# Allegro board filterboard.brd
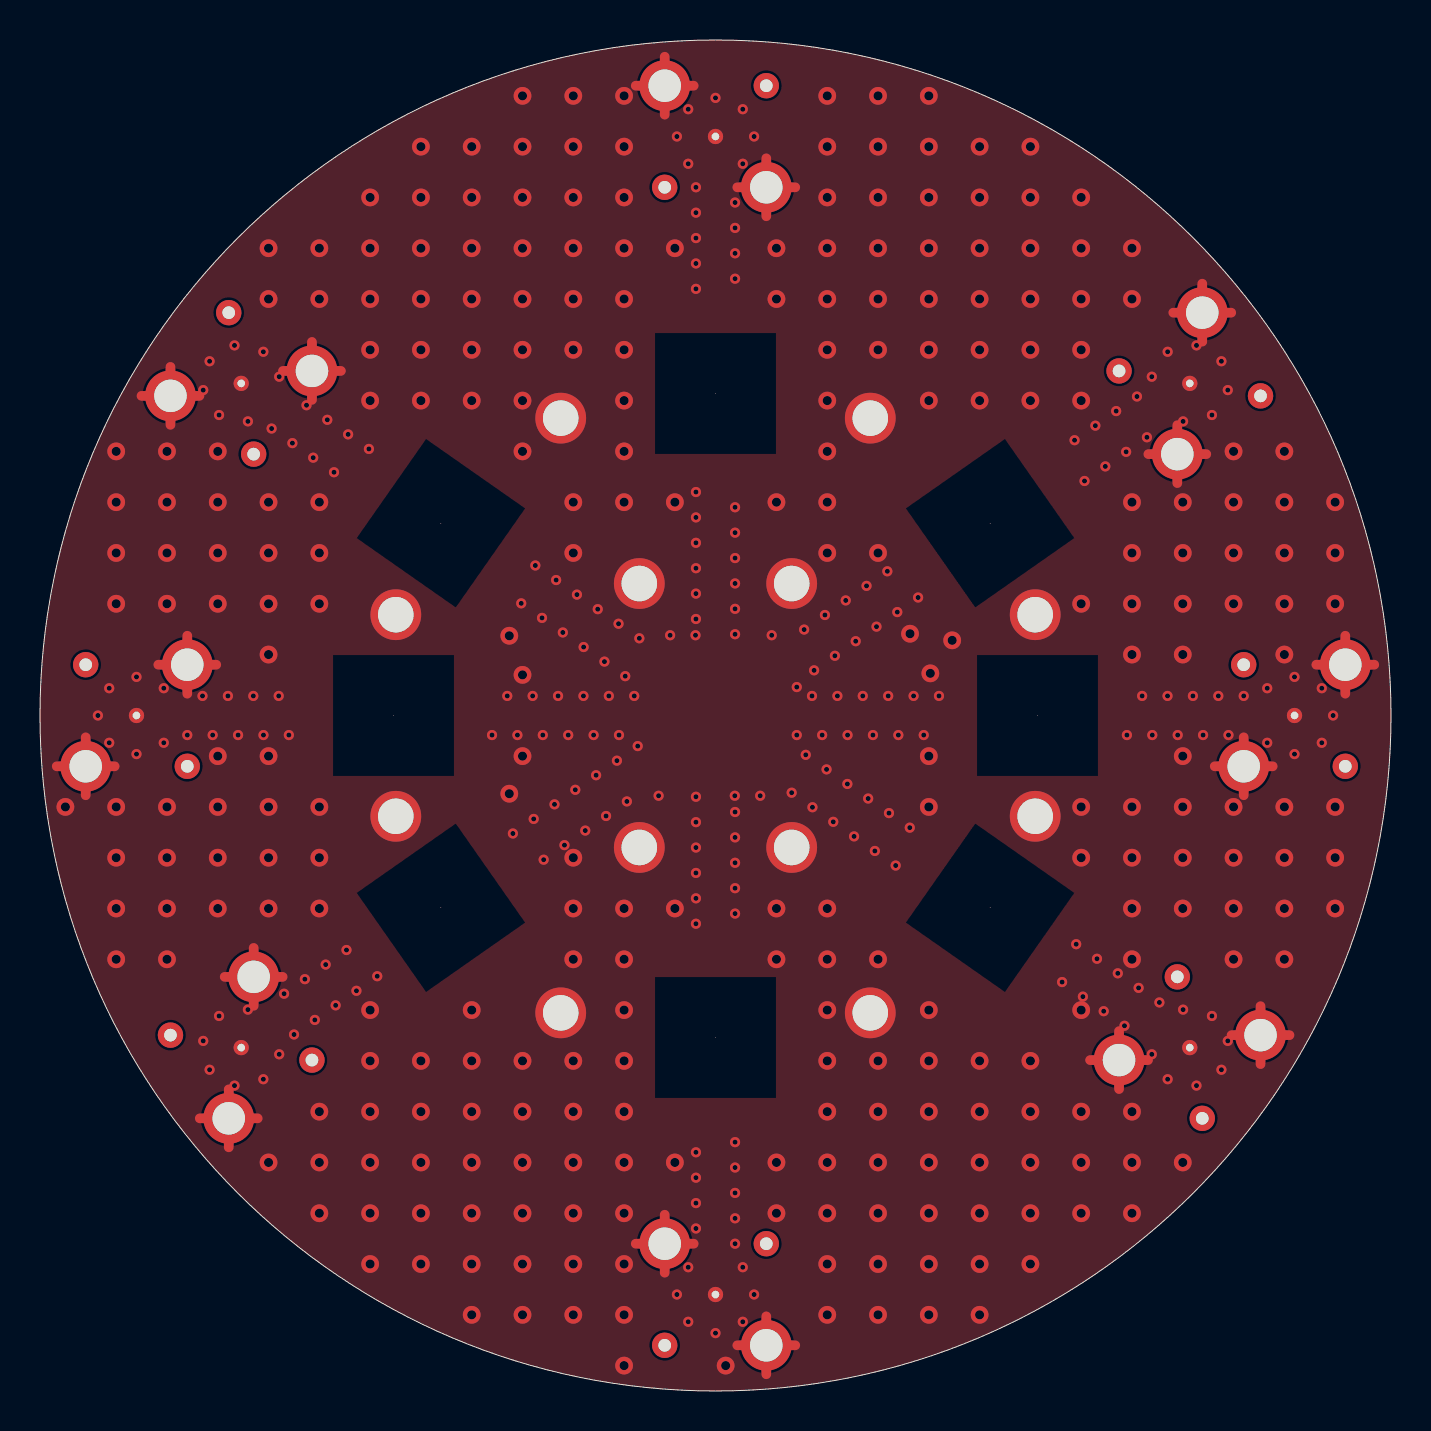
[diagram p0: board, top side]
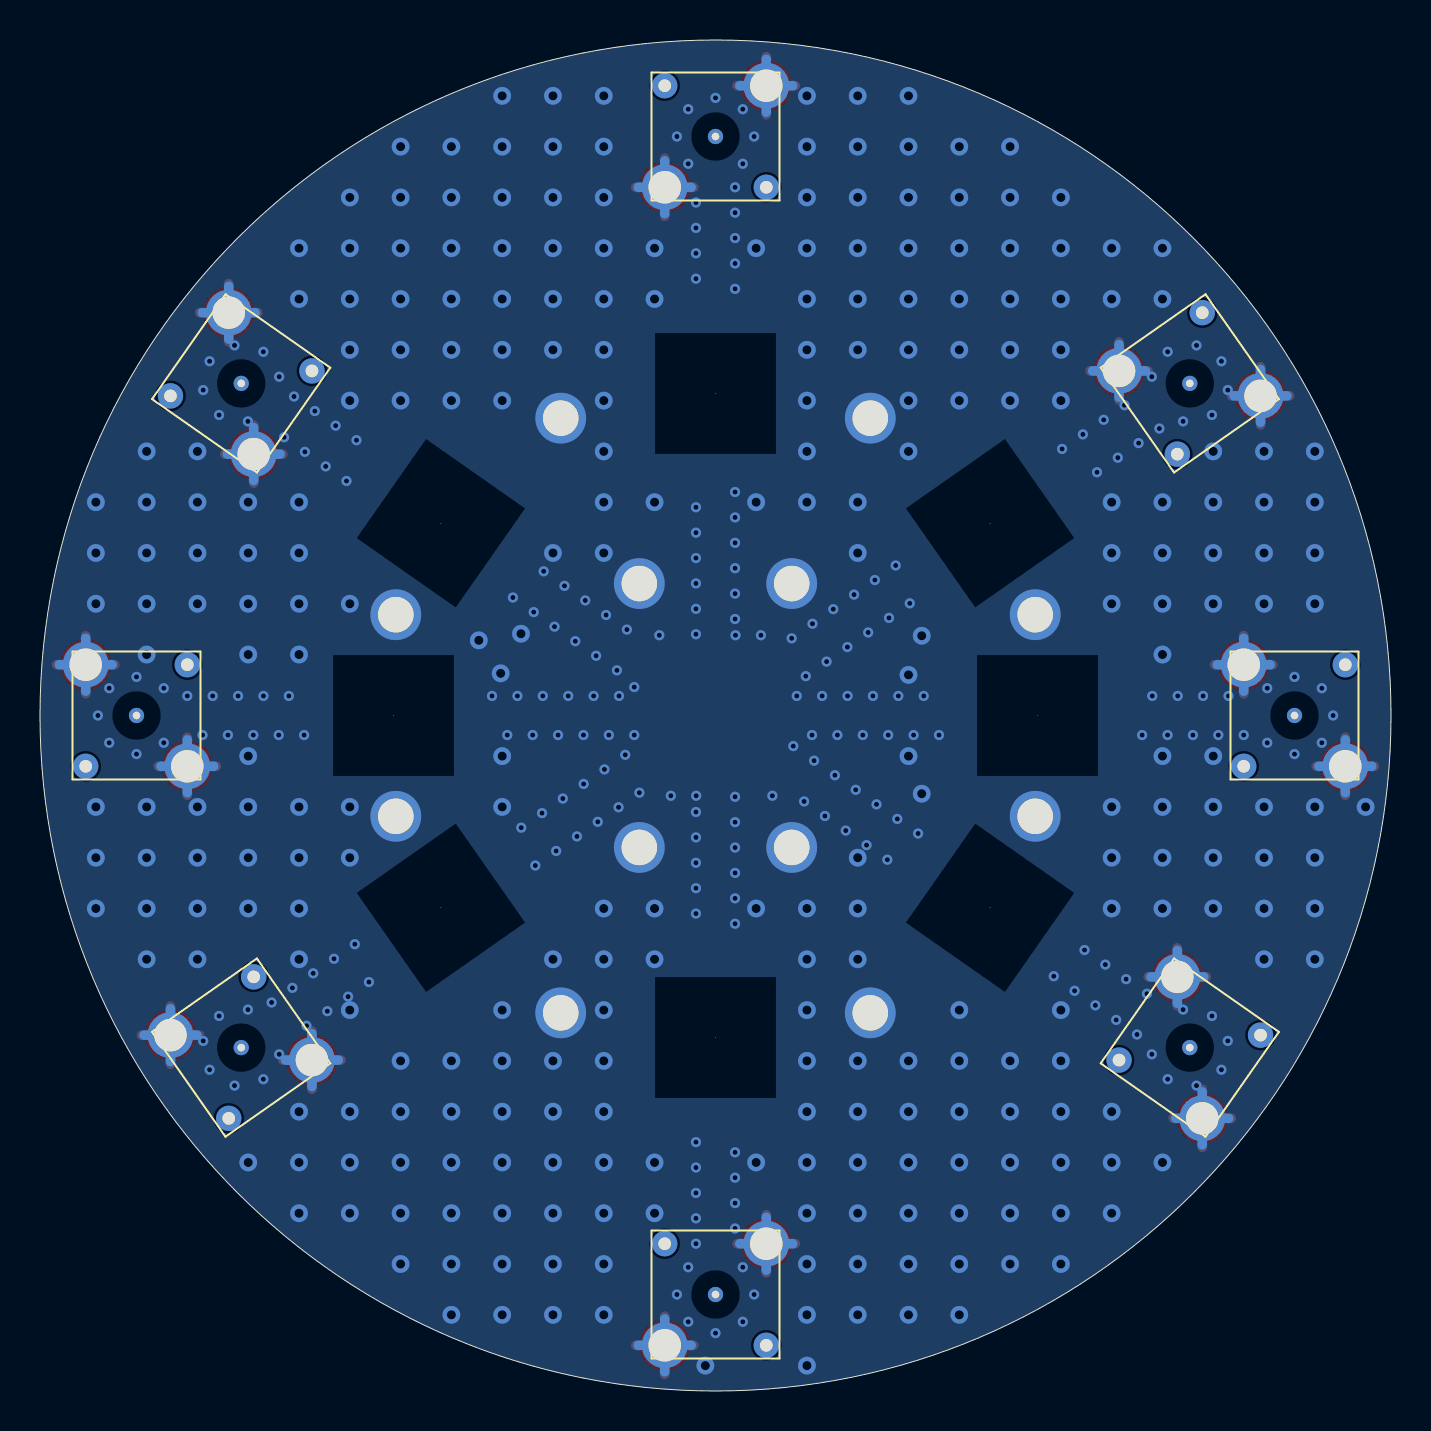
[diagram p1: board, bottom side, seen from below]

Outline 67.56 x 67.56 mm; copper layers: TOP, 02_GND, 03_SIG, BOTTOM. Coordinates in mm from the lower left corner of the outline.
Outline path: circle c33.78,33.78 r33.78

## Placement (name value [footprint] x y rotation side)
J1  -  [SSMA_BB]  62.74 33.78 180 bottom
J2  -  [SSMA_BB]  57.5 17.17 145 bottom
J3  -  [SSMA_BB]  33.78 4.83 90 bottom
J4  -  [SSMA_BB]  10.06 17.17 35 bottom
J5  -  [SSMA_BB]  4.83 33.78 0 bottom
J6  -  [SSMA_BB]  10.06 50.39 325 bottom
J7  -  [SSMA_BB]  33.78 62.74 270 bottom
J8  -  [SSMA_BB]  57.5 50.39 215 bottom
MTG1  -  [HOLE070P]  37.59 40.38 0 top
MTG2  -  [HOLE070P]  41.52 48.65 0 top
MTG3  -  [HOLE070P]  26.04 48.65 0 top
MTG4  -  [HOLE070P]  37.59 27.18 240 top
MTG5  -  [HOLE070P]  29.97 27.18 180 top
MTG6  -  [HOLE070P]  26.04 18.91 0 top
MTG7  -  [HOLE070P]  41.52 18.91 0 top
MTG8  -  [HOLE070P]  29.97 40.38 60 top
MTG9  -  [HOLE070P]  49.77 38.82 0 top
MTG10  -  [HOLE070P]  49.77 28.74 0 top
MTG11  -  [HOLE070P]  17.79 38.82 0 top
MTG12  -  [HOLE070P]  17.79 28.74 0 top
NOREF  -  []  33.78 30.28 90 top
NOREF#2  -  []  33.78 0 90 top
NOREF#3  -  []  33.78 30.78 90 top
R1  -  [FILTER]  49.88 33.78 0 top
R2  -  [FILTER]  47.51 24.17 325 top
R3  -  [FILTER]  33.78 17.68 0 top
R4  -  [FILTER]  20.05 24.17 215 top
R5  -  [FILTER]  17.68 33.78 0 top
R6  -  [FILTER]  20.05 43.4 145 top
R7  -  [FILTER]  33.78 49.88 0 top
R8  -  [FILTER]  47.51 43.4 35 top

## Library data of the parts
J1-J8 = SSMA_BB
MTG1-MTG12 = HOLE070P
R1-R8 = FILTER

## Footprints (pads in the part's own frame, mm; a bottom-side part is the same pattern mirrored in y, then rotated)
FILTER
  round 0.025 hole 5.994 unplated: (0,0)
HOLE070P
  round 2.54 hole 1.778: 1(0,0)
SSMA_BB
  round 1.27 hole 0.635: (-2.54,-2.54) (2.54,2.54)
  round 0.762 hole 0.381: 1(0,0)
  round 2.54 hole 1.626: 2(-2.54,2.54) 3(2.54,-2.54)

## Nets
GND: J1.2(TP-2) J1.3(TP-3) J2.2(TP-2) J2.3(TP-3) J3.2(TP-2) J3.3(TP-3) J4.2(TP-2) J4.3(TP-3) J5.2(TP-2) J5.3(TP-3) J6.2(TP-2) J6.3(TP-3) J7.2(TP-2) J7.3(TP-3) J8.2(TP-2) J8.3(TP-3) MTG1.1(TP-1) MTG2.1(TP-1) MTG3.1(TP-1) MTG4.1(TP-1) MTG5.1(TP-1) MTG6.1(TP-1) MTG7.1(TP-1) MTG8.1(TP-1) MTG9.1(TP-1) MTG10.1(TP-1) MTG11.1(TP-1) MTG12.1(TP-1)
MICROWAVE: J1.1(TP-1) J2.1(TP-1) J3.1(TP-1) J4.1(TP-1) J5.1(TP-1) J6.1(TP-1) J7.1(TP-1) J8.1(TP-1)

## Via types
v1: diameter 0.508, hole 0.254, TOP to BOTTOM, 228 vias
v2: diameter 0.889, hole 0.457, TOP to BOTTOM, 280 vias

## Routing (per net, layer and track width the routed paths; a pad name or vN(x,y) marks a point on that pad's centre or on a via; arc(x,y) is an arc through that point)
GND: length 261.8
  TOP w0.483: 12.15,51.01 J6.3 ; J6.3 13.6,49.57 ; J6.3 15.05,51.01 ; J6.3 13.6,52.46 ; J2.3 53.96,18 ; J2.3 53.96,15.1 ; J2.3 55.41,16.55 ; J2.3 52.52,16.55 ; J7.2 31.24,66.73 ; J7.2 29.79,65.28 ; J7.2 32.69,65.28 ; J7.2 31.24,63.83 ; J3.3 31.24,8.81 ; J3.3 32.69,7.37 ; J3.3 31.24,5.92 ; J3.3 29.79,7.37 ; J8.3 56.88,48.3 ; J8.3 55.43,46.85 ; J8.3 58.33,46.85 ; J8.3 56.88,45.4 ; 60.2,29.79 J1.3 ; J1.3 60.2,32.69 ; J1.3 58.75,31.24 ; J1.3 61.65,31.24 ; 34.87,2.29 J3.2 ; J3.2 36.32,3.73 ; J3.2 36.32,0.84 ; J3.2 37.77,2.29 ; 0.84,31.24 J5.2 ; J5.2 3.73,31.24 ; J5.2 2.29,29.79 ; J5.2 2.29,32.69 ; 34.87,60.2 J7.3 ; J7.3 37.77,60.2 ; J7.3 36.32,58.75 ; J7.3 36.32,61.65 ; 7.37,34.87 J5.3 ; J5.3 8.81,36.32 ; J5.3 7.37,37.77 ; J5.3 5.92,36.32 ; 9.44,12.19 J4.2 ; J4.2 7.99,13.64 ; J4.2 10.89,13.64 ; J4.2 9.44,15.08 ; 63.83,36.32 J1.2 ; J1.2 65.28,37.77 ; J1.2 65.28,34.87 ; J1.2 66.73,36.32 ; 61.04,16.35 J2.2 ; J2.2 61.04,19.25 ; J2.2 59.59,17.8 ; J2.2 62.49,17.8 ; J6.2 6.53,51.22 ; J6.2 5.08,49.77 ; J6.2 7.97,49.77 ; J6.2 6.53,48.32 ; 9.24,20.71 J4.3 ; J4.3 12.13,20.71 ; J4.3 10.69,22.16 ; J4.3 10.69,19.26 ; 58.13,52.48 J8.2 ; J8.2 58.13,55.38 ; J8.2 56.68,53.93 ; J8.2 59.57,53.93
  03_SIG w0.483: 0.96,31.24 J5.2 ; J5.2 3.61,31.24 ; J5.2 2.29,32.56 ; J5.2 2.29,29.92 ; 56.88,45.53 J8.3 ; J8.3 58.2,46.85 ; J8.3 56.88,48.17 ; J8.3 55.56,46.85 ; J5.3 8.69,36.32 ; J5.3 6.04,36.32 ; J5.3 7.37,37.64 ; J5.3 7.37,35 ; J1.3 60.2,32.56 ; J1.3 58.88,31.24 ; J1.3 61.52,31.24 ; J1.3 60.2,29.92 ; 29.92,65.28 J7.2 ; J7.2 32.56,65.28 ; J7.2 31.24,66.6 ; J7.2 31.24,63.96 ; 35,2.29 J3.2 ; J3.2 36.32,0.96 ; J3.2 36.32,3.61 ; J3.2 37.64,2.29 ; J6.3 14.92,51.01 ; J6.3 12.28,51.01 ; J6.3 13.6,52.34 ; J6.3 13.6,49.69 ; 9.44,12.31 J4.2 ; J4.2 9.44,14.96 ; J4.2 10.76,13.64 ; J4.2 8.12,13.64 ; J2.3 55.29,16.55 ; J2.3 53.96,17.87 ; J2.3 52.64,16.55 ; J2.3 53.96,15.23 ; 56.8,53.93 J8.2 ; J8.2 58.13,52.61 ; J8.2 59.45,53.93 ; J8.2 58.13,55.25 ; 31.24,6.04 J3.3 ; J3.3 32.56,7.37 ; J3.3 29.92,7.37 ; J3.3 31.24,8.69 ; J4.3 12.01,20.71 ; J4.3 9.37,20.71 ; J4.3 10.69,19.39 ; J4.3 10.69,22.03 ; 61.04,16.48 J2.2 ; J2.2 62.36,17.8 ; J2.2 61.04,19.12 ; J2.2 59.72,17.8 ; 63.96,36.32 J1.2 ; J1.2 65.28,35 ; J1.2 66.6,36.32 ; J1.2 65.28,37.64 ; 35,60.2 J7.3 ; J7.3 36.32,58.88 ; J7.3 37.64,60.2 ; J7.3 36.32,61.52 ; 5.2,49.77 J6.2 ; J6.2 7.85,49.77 ; J6.2 6.53,48.45 ; J6.2 6.53,51.09
  BOTTOM w0.483: J8.3 58.2,46.85 ; J8.3 55.56,46.85 ; J8.3 56.88,45.53 ; J8.3 56.88,48.17 ; 31.24,6.04 J3.3 ; J3.3 32.56,7.37 ; J3.3 29.92,7.37 ; J3.3 31.24,8.69 ; 36.32,58.88 J7.3 ; J7.3 36.32,61.52 ; J7.3 35,60.2 ; J7.3 37.64,60.2 ; J6.2 7.85,49.77 ; J6.2 6.53,51.09 ; J6.2 6.53,48.45 ; J6.2 5.2,49.77 ; J2.3 53.96,17.87 ; J2.3 52.64,16.55 ; J2.3 55.29,16.55 ; J2.3 53.96,15.23 ; J4.3 10.69,22.03 ; J4.3 12.01,20.71 ; J4.3 9.37,20.71 ; J4.3 10.69,19.39 ; J8.2 58.13,55.25 ; J8.2 59.45,53.93 ; J8.2 56.8,53.93 ; J8.2 58.13,52.61 ; J1.2 65.28,37.64 ; J1.2 63.96,36.32 ; J1.2 66.6,36.32 ; J1.2 65.28,35 ; 29.92,65.28 J7.2 ; J7.2 32.56,65.28 ; J7.2 31.24,66.6 ; J7.2 31.24,63.96 ; 59.72,17.8 J2.2 ; J2.2 61.04,16.48 ; J2.2 61.04,19.12 ; J2.2 62.36,17.8 ; J3.2 37.64,2.29 ; J3.2 35,2.29 ; J3.2 36.32,3.61 ; J3.2 36.32,0.96 ; 2.29,29.92 J5.2 ; J5.2 3.61,31.24 ; J5.2 2.29,32.56 ; J5.2 0.96,31.24 ; J5.3 8.69,36.32 ; J5.3 7.37,35 ; J5.3 6.04,36.32 ; J5.3 7.37,37.64 ; 8.12,13.64 J4.2 ; J4.2 9.44,12.31 ; J4.2 10.76,13.64 ; J4.2 9.44,14.96 ; J6.3 14.92,51.01 ; J6.3 12.28,51.01 ; J6.3 13.6,49.69 ; J6.3 13.6,52.34 ; J1.3 60.2,32.56 ; J1.3 58.88,31.24 ; J1.3 61.52,31.24 ; J1.3 60.2,29.92
  vias: v1(2.9,33.78) v1(3.46,35.15) v1(3.46,32.42) v1(4.83,35.71) v1(4.83,31.85) v1(6.19,35.15) v1(6.19,32.42) v1(7.37,32.8) v1(8.13,34.76) v1(8.16,50.06) v1(8.16,17.51) v1(8.48,51.5) v1(8.48,16.07) v1(8.64,32.8) v1(8.96,48.81) v1(8.96,18.75) v1(9.4,34.76) v1(9.73,52.29) v1(9.73,15.27) v1(9.91,32.8) v1(10.4,48.49) v1(10.4,19.07) v1(10.67,34.76) v1(11.17,51.97) v1(11.18,32.8) v1(11.17,15.59) v1(11.58,48.13) v1(11.96,50.73) v1(11.94,34.76) v1(11.96,16.84) v1(12.21,19.87) v1(12.45,32.8) v1(12.62,47.4) v1(12.7,17.83) v1(13.33,49.3) v1(13.25,20.6) v1(13.66,46.68) v1(13.74,18.56) v1(14.29,21.33) v1(14.37,48.57) v1(14.7,45.95) v1(14.79,19.29) v1(15.33,22.05) v1(15.41,47.84) v1(15.83,20.01) v1(16.45,47.11) v1(16.87,20.74) v1(22.61,32.8) v1(23.37,34.76) v1(23.65,27.88) v1(23.88,32.8) v1(24.07,39.39) v1(24.64,34.76) v1(24.69,28.61) v1(24.77,41.28) v1(25.11,38.66) v1(25.15,32.8) v1(25.19,26.57) v1(25.73,29.34) v1(25.81,40.56) v1(25.91,34.76) v1(26.15,37.93) v1(26.23,27.3) v1(26.42,32.8) v1(26.77,30.07) v1(26.85,39.83) v1(27.19,37.21) v1(27.18,34.76) v1(27.27,28.03) v1(27.69,32.8) v1(27.81,30.79) v1(27.89,39.1) v1(28.23,36.48) v1(28.31,28.76) v1(28.45,34.76) v1(28.85,31.52) v1(28.93,38.37) v1(28.96,32.8) v1(29.27,35.75) v1(29.35,29.48) v1(29.72,34.76) v1(29.89,32.25) v1(29.97,37.64) v1(30.94,29.77) v1(31.51,37.8) v1(31.85,62.74) v1(31.85,4.83) v1(32.42,64.1) v1(32.42,61.37) v1(32.42,6.19) v1(32.42,3.46) v1(32.8,60.2) v1(32.8,58.93) v1(32.8,57.66) v1(32.8,56.39) v1(32.8,55.12) v1(32.8,44.96) v1(32.8,43.69) v1(32.8,42.42) v1(32.8,41.15) v1(32.8,39.88) v1(32.8,38.61) v1(32.78,37.8) v1(32.8,29.72) v1(32.8,28.45) v1(32.8,27.18) v1(32.8,25.91) v1(32.8,24.64) v1(32.8,23.37) v1(32.8,11.94) v1(32.8,10.67) v1(32.8,9.4) v1(32.8,8.13) v1(33.78,64.67) v1(33.78,2.9) v1(34.76,59.44) v1(34.76,58.17) v1(34.76,56.9) v1(34.76,55.63) v1(34.76,44.2) v1(34.76,42.93) v1(34.76,41.66) v1(34.76,40.39) v1(34.76,39.12) v1(34.76,37.85) v1(34.75,29.77) v1(34.76,28.96) v1(34.76,27.69) v1(34.76,26.42) v1(34.76,25.15) v1(34.76,23.88) v1(34.76,12.45) v1(34.76,11.18) v1(34.76,9.91) v1(34.76,8.64) v1(34.76,7.37) v1(35.15,64.1) v1(35.15,61.37) v1(35.15,6.19) v1(35.15,3.46) v1(35.71,62.74) v1(35.71,4.83) v1(36.02,29.77) v1(36.59,37.8) v1(37.59,29.92) v1(37.85,35.2) v1(37.85,32.8) v1(38.21,38.08) v1(38.3,31.82) v1(38.61,34.76) v1(38.63,29.19) v1(38.71,36.04) v1(39.12,32.8) v1(39.25,38.81) v1(39.34,31.09) v1(39.67,28.46) v1(39.75,36.77) v1(39.88,34.76) v1(40.3,39.54) v1(40.39,32.8) v1(40.38,30.36) v1(40.71,27.74) v1(40.79,37.5) v1(41.15,34.76) v1(41.34,40.26) v1(41.42,29.63) v1(41.66,32.8) v1(41.75,27.01) v1(41.83,38.23) v1(42.38,40.99) v1(42.42,34.76) v1(42.46,28.9) v1(42.79,26.28) v1(42.87,38.95) v1(42.93,32.8) v1(43.5,28.17) v1(43.69,34.76) v1(43.91,39.68) v1(44.2,32.8) v1(44.96,34.76) v1(51.11,20.45) v1(51.74,47.55) v1(51.82,22.35) v1(52.16,19.72) v1(52.24,45.51) v1(52.78,48.28) v1(52.86,21.62) v1(53.2,18.99) v1(53.28,46.24) v1(53.82,49.01) v1(53.9,20.89) v1(54.32,46.97) v1(54.24,18.27) v1(54.36,32.8) v1(54.86,49.73) v1(54.94,20.16) v1(55.12,34.76) v1(55.36,47.7) v1(55.6,50.73) v1(55.63,32.8) v1(55.6,16.84) v1(55.98,19.43) v1(56.39,51.97) v1(56.39,34.76) v1(56.39,15.59) v1(56.9,32.8) v1(57.17,48.49) v1(57.17,19.07) v1(57.66,34.76) v1(57.84,52.29) v1(57.84,15.27) v1(58.17,32.8) v1(58.61,48.81) v1(58.61,18.75) v1(58.93,34.76) v1(59.08,51.5) v1(59.08,16.07) v1(59.4,50.06) v1(59.4,17.51) v1(59.44,32.8) v1(60.2,34.76) v1(61.37,35.15) v1(61.37,32.42) v1(62.74,35.71) v1(62.74,31.85) v1(64.1,35.15) v1(64.1,32.42) v1(64.67,33.78) v2(1.27,29.21) v2(3.81,46.99) v2(3.81,44.45) v2(3.81,41.91) v2(3.81,39.37) v2(3.81,29.21) v2(3.81,26.67) v2(3.81,24.13) v2(3.81,21.59) v2(6.35,46.99) v2(6.35,44.45) v2(6.35,41.91) v2(6.35,39.37) v2(6.35,29.21) v2(6.35,26.67) v2(6.35,24.13) v2(6.35,21.59) v2(8.89,46.99) v2(8.89,44.45) v2(8.89,41.91) v2(8.89,39.37) v2(8.89,31.75) v2(8.89,29.21) v2(8.89,26.67) v2(8.89,24.13) v2(11.43,57.15) v2(11.43,54.61) v2(11.43,44.45) v2(11.43,41.91) v2(11.43,39.37) v2(11.43,36.83) v2(11.43,31.75) v2(11.43,29.21) v2(11.43,26.67) v2(11.43,24.13) v2(11.43,11.43) v2(13.97,57.15) v2(13.97,54.61) v2(13.97,44.45) v2(13.97,41.91) v2(13.97,39.37) v2(13.97,29.21) v2(13.97,26.67) v2(13.97,24.13) v2(13.97,13.97) v2(13.97,11.43) v2(13.97,8.89) v2(16.51,59.69) v2(16.51,57.15) v2(16.51,54.61) v2(16.51,52.07) v2(16.51,49.53) v2(16.51,19.05) v2(16.51,16.51) v2(16.51,13.97) v2(16.51,11.43) v2(16.51,8.89) v2(16.51,6.35) v2(19.05,62.23) v2(19.05,59.69) v2(19.05,57.15) v2(19.05,54.61) v2(19.05,52.07) v2(19.05,49.53) v2(19.05,16.51) v2(19.05,13.97) v2(19.05,11.43) v2(19.05,8.89) v2(19.05,6.35) v2(21.59,62.23) v2(21.59,59.69) v2(21.59,57.15) v2(21.59,54.61) v2(21.59,52.07) v2(21.59,49.53) v2(21.59,19.05) v2(21.59,16.51) v2(21.59,13.97) v2(21.59,11.43) v2(21.59,8.89) v2(21.59,6.35) v2(21.59,3.81) v2(23.47,37.77) v2(23.47,29.87) v2(24.13,64.77) v2(24.13,62.23) v2(24.13,59.69) v2(24.13,57.15) v2(24.13,54.61) v2(24.13,52.07) v2(24.13,49.53) v2(24.13,46.99) v2(24.13,35.81) v2(24.13,31.75) v2(24.13,16.51) v2(24.13,13.97) v2(24.13,11.43) v2(24.13,8.89) v2(24.13,6.35) v2(24.13,3.81) v2(26.67,64.77) v2(26.67,62.23) v2(26.67,59.69) v2(26.67,57.15) v2(26.67,54.61) v2(26.67,52.07) v2(26.67,44.45) v2(26.67,41.91) v2(26.67,26.67) v2(26.67,24.13) v2(26.67,21.59) v2(26.67,16.51) v2(26.67,13.97) v2(26.67,11.43) v2(26.67,8.89) v2(26.67,6.35) v2(26.67,3.81) v2(29.21,64.77) v2(29.21,62.23) v2(29.21,59.69) v2(29.21,57.15) v2(29.21,54.61) v2(29.21,52.07) v2(29.21,49.53) v2(29.21,46.99) v2(29.21,44.45) v2(29.21,24.13) v2(29.21,21.59) v2(29.21,19.05) v2(29.21,16.51) v2(29.21,13.97) v2(29.21,11.43) v2(29.21,8.89) v2(29.21,6.35) v2(29.21,3.81) v2(29.21,1.27) v2(31.75,57.15) v2(31.75,44.45) v2(31.75,24.13) v2(31.75,11.43) v2(34.29,1.27) v2(36.83,57.15) v2(36.83,54.61) v2(36.83,44.45) v2(36.83,24.13) v2(36.83,21.59) v2(36.83,11.43) v2(36.83,8.89) v2(39.37,64.77) v2(39.37,62.23) v2(39.37,59.69) v2(39.37,57.15) v2(39.37,54.61) v2(39.37,52.07) v2(39.37,49.53) v2(39.37,46.99) v2(39.37,44.45) v2(39.37,41.91) v2(39.37,24.13) v2(39.37,21.59) v2(39.37,19.05) v2(39.37,16.51) v2(39.37,13.97) v2(39.37,11.43) v2(39.37,8.89) v2(39.37,6.35) v2(39.37,3.81) v2(41.91,64.77) v2(41.91,62.23) v2(41.91,59.69) v2(41.91,57.15) v2(41.91,54.61) v2(41.91,52.07) v2(41.91,41.91) v2(41.91,21.59) v2(41.91,16.51) v2(41.91,13.97) v2(41.91,11.43) v2(41.91,8.89) v2(41.91,6.35) v2(41.91,3.81) v2(43.51,37.87) v2(44.45,64.77) v2(44.45,62.23) v2(44.45,59.69) v2(44.45,57.15) v2(44.45,54.61) v2(44.45,52.07) v2(44.45,49.53) v2(44.53,35.89) v2(44.45,31.75) v2(44.45,29.21) v2(44.45,19.05) v2(44.45,16.51) v2(44.45,13.97) v2(44.45,11.43) v2(44.45,8.89) v2(44.45,6.35) v2(44.45,3.81) v2(45.62,37.54) v2(46.99,62.23) v2(46.99,59.69) v2(46.99,57.15) v2(46.99,54.61) v2(46.99,52.07) v2(46.99,49.53) v2(46.99,16.51) v2(46.99,13.97) v2(46.99,11.43) v2(46.99,8.89) v2(46.99,6.35) v2(46.99,3.81) v2(49.53,62.23) v2(49.53,59.69) v2(49.53,57.15) v2(49.53,54.61) v2(49.53,52.07) v2(49.53,49.53) v2(49.53,16.51) v2(49.53,13.97) v2(49.53,11.43) v2(49.53,8.89) v2(49.53,6.35) v2(52.07,59.69) v2(52.07,57.15) v2(52.07,54.61) v2(52.07,52.07) v2(52.07,49.53) v2(52.07,39.37) v2(52.07,29.21) v2(52.07,26.67) v2(52.07,19.05) v2(52.07,13.97) v2(52.07,11.43) v2(52.07,8.89) v2(54.61,57.15) v2(54.61,54.61) v2(54.61,44.45) v2(54.61,41.91) v2(54.61,39.37) v2(54.61,36.83) v2(54.61,29.21) v2(54.61,26.67) v2(54.61,24.13) v2(54.61,21.59) v2(54.61,13.97) v2(54.61,11.43) v2(54.61,8.89) v2(57.15,44.45) v2(57.15,41.91) v2(57.15,39.37) v2(57.15,36.83) v2(57.15,31.75) v2(57.15,29.21) v2(57.15,26.67) v2(57.15,24.13) v2(57.15,11.43) v2(59.69,46.99) v2(59.69,44.45) v2(59.69,41.91) v2(59.69,39.37) v2(59.69,29.21) v2(59.69,26.67) v2(59.69,24.13) v2(59.69,21.59) v2(62.23,46.99) v2(62.23,44.45) v2(62.23,41.91) v2(62.23,39.37) v2(62.23,36.83) v2(62.23,29.21) v2(62.23,26.67) v2(62.23,24.13) v2(62.23,21.59) v2(64.77,44.45) v2(64.77,41.91) v2(64.77,39.37) v2(64.77,29.21) v2(64.77,26.67) v2(64.77,24.13)
MICROWAVE: length 231.6
  03_SIG w0.483: J2.1 47.51,24.17 20.05,43.4 J6.1 ; J4.1 20.05,24.17 47.51,43.4 J8.1 ; J1.1 J5.1 ; J3.1 J7.1

## Copper pours and planes (outline as drawn; the poured copper is in the pictures)
GND on TOP, BOTTOM, 02_GND, 03_SIG: 0,33.78 67.56,33.78

## Text on the board
User.Comments: NOTES: UNLESS OTHERWISE SPECIFIED | - CLASS 2 | - MATERIAL: FR408 RECOMMENDED | - COPPER WEGITH: SEE XSECTION | - BOARD FINISH THICKNESS; 0.057 INCHES +/- <.010 OR 10% | - SOLDERMASK: NOT REQUIRED | - ALL INSIDE CORNERS AND SLOTS SHALL HAVE .062 INCHES | +/- 0.005" OR LESS RADIUS | - LEGEND/SILKSCREEN: NOT REQUIRED | - DRILLING: ALL HOLES TO BE LOCATED BY X & Y COORDINATES | FROM NC DRILL DATA SUPPLIED. SEE DRILL TABLE FOR HOLE | SIZES AND QUANTITY DRILLED HOLE TRUE POSITION DIFFERENCE | FROM CAD DATA IS NOT TO EXCESS 0.005" | - MINIMUM ANULAR RING OF 1 MIL. UNLESS OTHERWISE SPECIFIED | - COPPER PLATING HOLE WALL TO BE .001" MINIMUM | - FINISH COPPER SURFACE NOT TO BE PLATED | - CONDUCTOR: WIDTHS AND SPACING: TRACE WIDTH CAN BE | MODIFIED TO ACHEIVE 50 OHM CHARACTERISITC IMPEDANCE | - ON THE 8 CAVITIES (R), PLEASE CREATE A 7 MIL X 7 MIL | ABOVE THEM IN THE SAME ORIENTATION THROUGH LAYERS 1 AND | 2 TO EXPOSE LAYER 3 (SAME DIMENSIONS AS CENTER CAVITY)
XSECTION_CHART: *  SURFACE - 0 MIL | L1: TOP CONDUCTOR - 1.8 MIL | *  DIELECTRIC - 16 MIL | L2: 02_GND PLANE - 2.4 MIL | *  DIELECTRIC - 21.9 MIL | L3: 03_SIG CONDUCTOR - 0.8 MIL | *  DIELECTRIC - 12 MIL | L4: BOTTOM CONDUCTOR - 2.4 MIL | 1-4 | 3-4
DIMENSION: Cutout Tru | 7MM x 7MM
User.6: FIGURE | SIZE | 10.0 | 18.0 | 25.0 | 64.0 | 70.0 | 236.0x236.0 | DRILL CHART: TOP to BOTTOM | ALL UNITS ARE IN MILS | TOLERANCE | +3.0/-3.0 | PLATED | NON-PLATED | QTY | 228 | 285 | 16 | 12 | 1 | 4
User.7: FIGURE | SIZE | 15.0 | DRILL CHART: 03_SIG to BOTTOM | ALL UNITS ARE IN MILS | TOLERANCE | +3.0/-3.0 | PLATED | QTY | 8
